# Altium PCB novena_battery_evt1a.PcbDoc (part 3 of 3)
Units mil, origin at the board's own origin, x right, y up, seen from the top; angles counter-clockwise.
Board outline 4763.78 x 1614.17 mil, 4 copper layers (Top Layer, Internal Plane 1, Internal Plane 2, Bottom Layer), stack 65.8 mil thick; 204 components, 130 nets, 1424 pads, 318 vias.
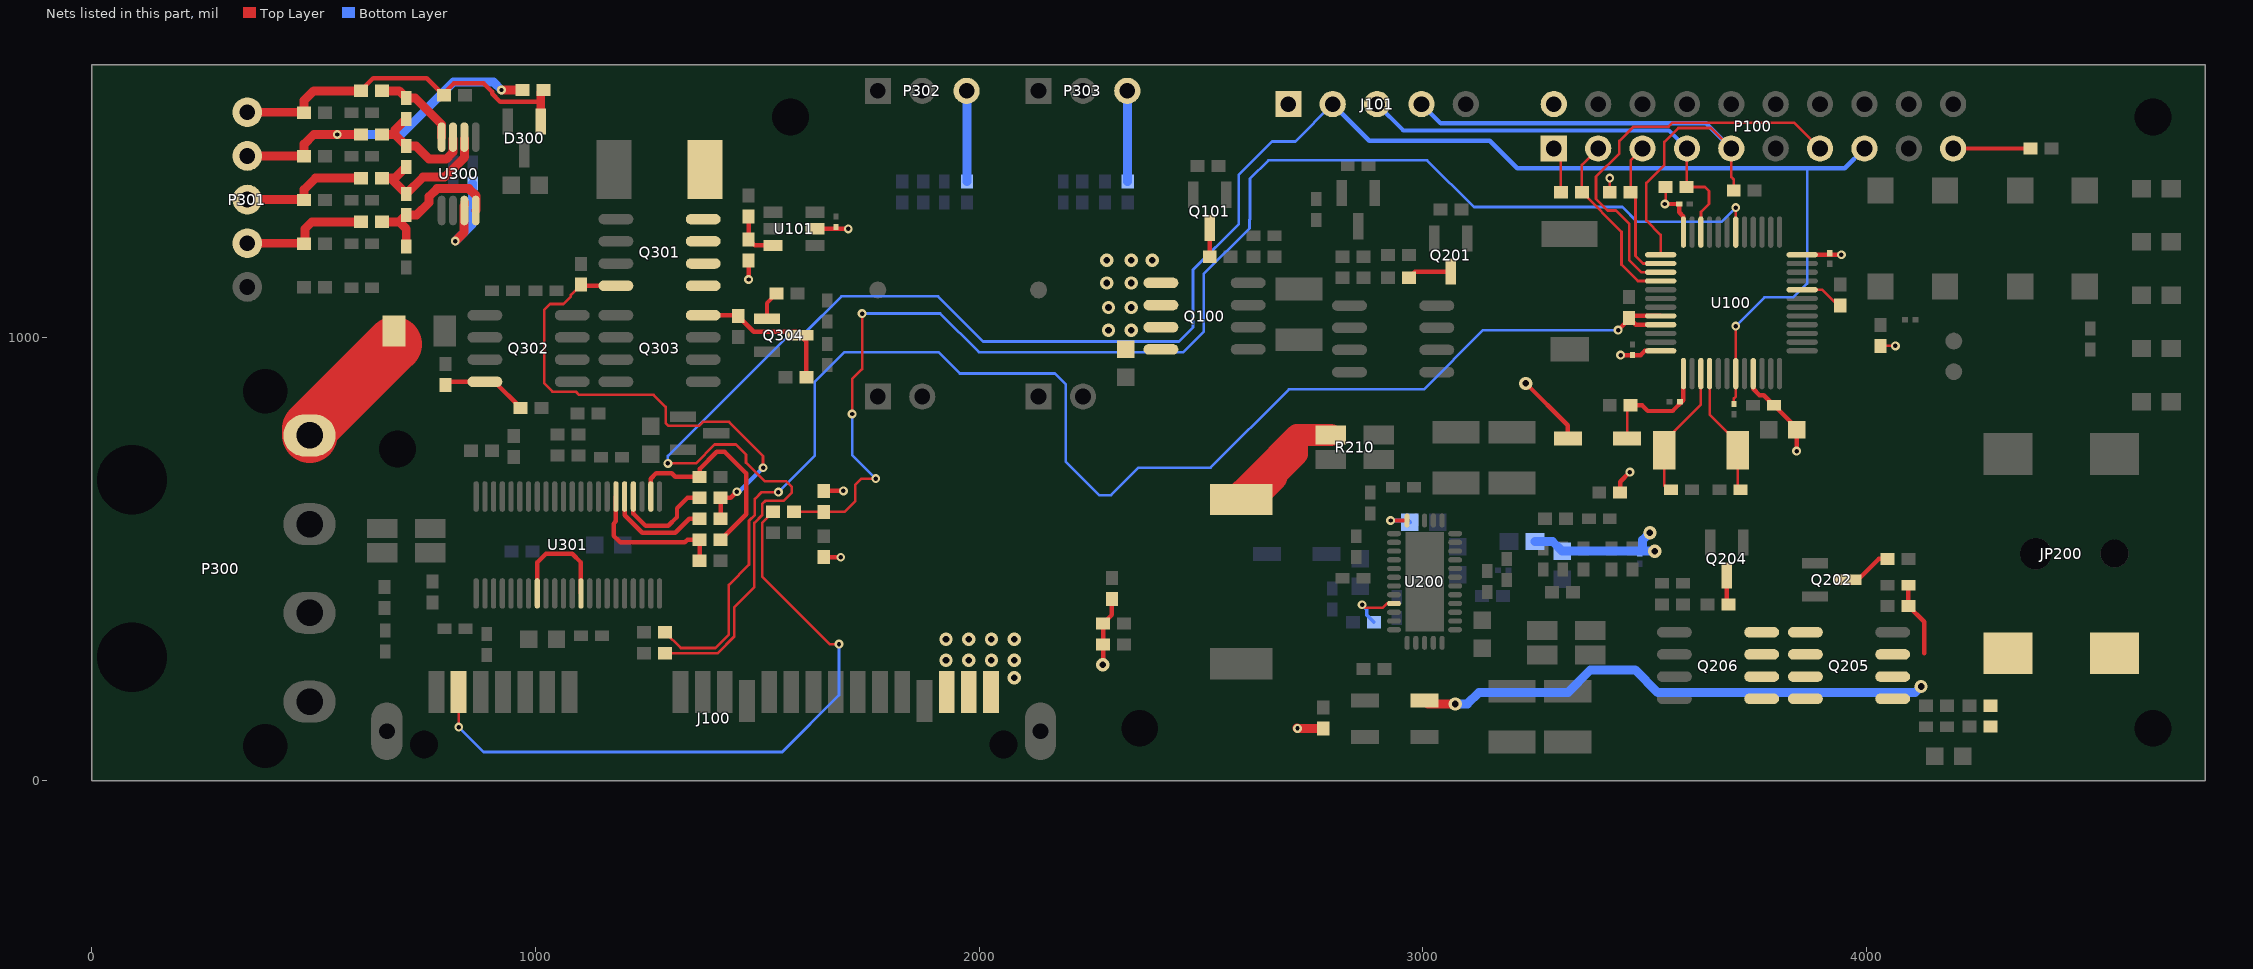
[diagram p5: the nets of this part, all layers, seen from the top]

## Via types
v1: diameter 20, hole 10, Top Layer to Bottom Layer, tented both sides, 179 vias
v2: diameter 30, hole 15, Top Layer to Bottom Layer, tented both sides, 129 vias
v3: diameter 25.98, hole 12.99, Top Layer to Bottom Layer, tented top, 10 vias

## Nets (pads, with @x,y where several pads share a name; then routed paths per layer and width w, separated by ;. In a path a pad name is that pad's centre, name@x,y a point inside that pad or via, vN(x,y) a via of type N, cw(c..) or ccw(c..) an arc to the next point about the centre after c; other vN are vias at no path point) (continued)
NetJ100_21: J100.21 R100.2 | length 1520.1
  Top Layer w6: J100.21@826.57,199.8 826.57,121.26 v1(826.77,121.06) ; R100.2@1535.43,606.3 1510.68,581.55 1510.68,460.48 1663.09,308.07 v1(1684.06,308.07)
  Bottom Layer w6: v1(826.77,121.06) 882.87,64.96 1556.1,64.96 1684.06,192.91 v1(1684.06,308.07)
NetL200_2: L200.2 R210.2 | length 554.2
  Top Layer w10: L200.2@2590.55,633.86 2622.05,665.35 2622.05,685.04
  Top Layer w50: L200.2@2590.55,633.86 2590.55,653.54 2622.05,685.04 2716.54,779.53 ; L200.2@2622.05,665.35 2622.05,633.86 2669.29,681.1 2669.29,688.98 2716.54,736.22 2716.54,779.53 ; R210.2@2792.32,779.53 2716.54,779.53
NetP100_19: P100.19 R115.2 | length 174.8
  Top Layer w10: P100.19@4195.28,1425.2 R115.2@4370.08,1425.2
NetP302_3: P302.3 R336.2 | length 205.1
  Bottom Layer w20: P302.3@1971.65,1555.12 1972.44,1554.33 R336.2@1972.44,1350.39
NetP303_3: P303.3 R337.2 | length 205.1
  Bottom Layer w20: P303.3@2333.86,1555.12 2334.65,1554.33 R337.2@2334.65,1350.39
NetQ101_3: Q101.3 R105.1 | length 65
  Top Layer w10: R105.1@2519.69,1181.1 Q101.3@2519.69,1246.06
NetQ201_3: Q201.3 R201.2 | length 100.2
  Top Layer w10: R201.2@2968.5,1133.86 2982.28,1147.64 Q201.3@3062.99,1147.64
NetQ202_3: Q202.3 R205.2 | length 108.2
  Top Layer w10: Q202.3@3958.66,452.76 3980.32,452.76 4027.56,500 R205.2@4047.24,500
NetQ204_3: Q204.3 R206.1 | length 66.6
  Top Layer w10: Q204.3@3685.04,462.6 3685.04,401.57 R206.1@3688.98,397.64
NetQ205_5: Q205.5 Q205.6 Q205.7 Q205.8 Q206.5 Q206.6 Q206.7 Q206.8
NetQ301_4: Q301.4 R301.1 R320.1 R321.1 | length 1141.1
  Top Layer w6: R301.1@1102.36,1118.11 1079.72,1095.47 1079.72,1091.54 1062.99,1074.8 1032.48,1074.8 1019.69,1062.01 1019.69,895.67 1038.39,876.97 1090.62,876.97 1097.51,870.08 1265.75,870.08 1293.31,842.52 1293.31,806.17 1299.42,800.06 1367.97,800.06 1376.97,809.06 1435.96,809.06 1512.8,732.22 v1(1512.8,705.71)
  Top Layer w10: R301.1@1102.36,1118.11 1104.53,1115.94 Q301.4@1181.1,1115.94 ; R321.1@1417.32,590.55 R320.1@1417.32,637.8 1439.96,637.8 v1(1453.74,651.57)
  Bottom Layer w10: v1(1453.74,651.57) 1458.66,651.57 v1(1512.8,705.71)
NetQ301_5: Q301.5 Q301.6 Q301.7 Q301.8 R300.1
NetQ302_4: Q302.4 R303.2 R307.1 | length 196.9
  Top Layer w10: R303.2@797.24,891.73 804.92,899.41 Q302.4@885.83,899.41 907.68,899.41 R307.1@966.54,840.55
NetQ303_4: Q303.4 Q304.3 R304.1 R308.1 | length 337.5
  Top Layer w10: Q303.4@1377.95,1049.41 1454.53,1049.41 R304.1@1456.69,1047.24 1492.13,1011.81 1588.58,1011.81 Q304.3@1596.46,1003.94 1610.24,990.16 R308.1@1610.24,909.45
NetQ304_1: Q304.1 R311.1 | length 66.1
  Top Layer w10: Q304.1@1521.65,1041.34 1521.65,1076.77 R311.1@1543.31,1098.43
NetR116_2: R116.2 U100.20 | length 100.9
  Top Layer w6: U100.20@3854.98,1106.83 3900.06,1106.83 3936.02,1070.87 R116.2@3940.95,1070.87
NetR117_2: R117.2 R118.1 U101.6 | length 112
  Top Layer w10: R118.1@1480.31,1271.65 R117.2@1480.31,1220.47 1494.09,1206.69 U101.6@1535.43,1206.69
NetR211_1: R211.1 U200.26 | length 129.2
  Top Layer w6: v1(2863.19,396.65) 2870.08,389.76 2909.45,389.76 2919.29,399.61 U200.26@2935.04,399.61
  Bottom Layer w8: v1(2863.19,396.65) 2874.02,385.83 2874.02,373.03 R211.1@2889.76,357.28
NetR319_2: R319.2 R322.2 U301.2 | length 490.7
  Top Layer w10: U301.2@1259.84,640.75 1259.84,681.1 1271.65,692.91 1307.09,692.91 1314.96,685.04 R319.2@1370.08,685.04 1370.08,702.93 1408.62,741.47 1426.02,741.47 1474.74,692.75 1474.74,600.72 R322.2@1417.32,543.31
NetR320_2: R320.2 U301.4 | length 237
  Top Layer w10: U301.4@1220.47,640.75 1220.47,602.36 1248.03,574.8 1299.21,574.8 1318.9,594.49 1318.9,614.17 1342.52,637.8 R320.2@1370.08,637.8
NetR321_2: R321.2 U301.5 | length 241.2
  Top Layer w10: U301.5@1200.79,640.75 1200.79,598.43 1240.41,558.8 1314.71,558.8 1346.46,590.55 R321.2@1370.08,590.55
NetR322_1: R322.1 R323.1 U301.6 | length 340.6
  Top Layer w10: U301.6@1181.1,640.75 1181.1,584.82 1175.85,579.56 1175.85,552.5 1190.94,537.4 1336.61,537.4 1342.52,543.31 R322.1@1370.08,543.31 R323.1@1370.08,496.06
NetU301_30: U301.30 U301.35 | length 254.5
  Top Layer w10: U301.30@1003.94,422.24 1003.94,492.13 1023.62,511.81 1082.68,511.81 1102.36,492.13 U301.35@1102.36,422.24
P2_CD: C309.1 U300.3 | length 242.4
  Top Layer w20: v1(818.9,1216.53) 839.16,1236.79 839.16,1296.2 840.3,1297.34 U300.3@840.3,1303.82
  Bottom Layer w20: v1(818.9,1216.53) 858.27,1255.9 C309.1@858.27,1346.46
P2_VC1: C304.1 R306.2 U300.8 | length 194.8
  Top Layer w20: R306.2@653.54,1555.12 692.91,1555.12 C304.1@708.66,1539.37 728.35,1539.37 788.39,1479.33 U300.8@788.39,1450.79
P2_VC2: C304.2 C306.1 R310.2 U300.7 | length 265.3
  Top Layer w20: R310.2@653.54,1456.69 683.07,1456.69 ; C304.2@708.66,1492.13 683.07,1466.54 683.07,1456.69 ; U300.7@813.98,1446.19 813.98,1416.62 798.68,1401.32 760.09,1401.32 730.32,1431.1 C306.1@708.66,1431.1 683.07,1456.69
P2_VC3: C306.2 C308.1 R312.2 U300.6 | length 302.2
  Top Layer w20: C306.2@708.66,1383.86 683.07,1358.27 673.23,1358.27 C308.1@708.66,1322.83 746.72,1360.9 795.03,1360.9 839.98,1405.85 U300.6@839.98,1446.19
P2_VC4: C308.2 C311.1 R318.2 U300.4 | length 353.7
  Top Layer w20: R318.2@653.54,1259.84 692.91,1259.84 ; C311.1@708.66,1204.72 708.66,1244.09 692.91,1259.84 ; U300.4@865.16,1285.43 866.3,1286.57 866.3,1318.46 849.86,1334.9 778.09,1334.9 759.84,1316.65 759.84,1303.15 732.28,1275.59 C308.2@708.66,1275.59 692.91,1259.84
P3.3V_UC: C102.1 C103.1 C104.1 C106.1 C107.1 C112.2 C113.2 C115.1 C222.1 D100.1 J101.1 L100.2 P100.1 P100.2 R109.2 R110.2 R111.2 R112.2 R113.2 R117.1 R119.2 R216.1 R220.1 R222.1 R225.1 R226.1 U100.9 U100.24 U100.36 U100.48 U101.2 U200.17 | length 1771.2
  Top Layer w6: P100.1@3295.28,1425.2 3311.02,1409.45 R113.2@3311.02,1326.77 ; R112.2@3421.26,1326.77 v1(3421.26,1358.27) ; v1@3545.28,1300.2 3547.24,1302.17 R111.2@3547.24,1338.58 ; R119.2@4031.5,980.31 v1(4064.96,980.32)
  Top Layer w10: v1@1479.33,1128.94 v1(1480.31,1129.92) R117.1@1480.31,1173.23 ; U101.2@1629.92,1244.09 v1(1704.72,1244.09) ; R109.2@1649.61,503.94 v1(1687.99,503.94) ; R110.2@1649.61,653.54 v1(1693.9,653.54) ; v2(2278.54,261.81) 2279.53,262.8 R225.1@2279.53,307.09 R226.1@2279.53,354.33 2299.21,374.02 R222.1@2299.21,409.45 ; v1(2927.17,586.61) U200.17@2964.57,586.61 ; v2(3232.28,895.67) 3326.77,801.18 D100.1@3326.77,771.65 D100.1@3337.6,771.65 ; R220.1@3444.88,649.61 3444.88,674.21 v1(3466.54,695.87) ; v1(3445.87,959.65) 3491.14,959.65 3500.54,969.04 U100.48@3536.08,969.04 ; v1@3545.28,1300.2 v1(3545.45,1300.02) C103.1@3577.93,1300.02 3577.93,1281.32 3587.27,1271.99 U100.36@3587.27,1236.76 ; U100.9@3744.75,917.86 3744.75,883.38 3758.86,869.27 3768.53,869.27 C112.2@3791.34,846.46 3842.52,795.28 C113.2@3842.52,791.34 v1(3842.52,743.11) v1@3843.5,742.13 ; U100.24@3854.98,1185.57 v1(3943.45,1185.57) v1@3943.9,1186.02
  Top Layer w20: v1@2716.54,119.09 v1(2717.52,118.11) R216.1@2775.59,118.11
  Bottom Layer w10: v1(2927.17,586.61) 2966.54,586.61 C222.1@2970.47,582.68
  Bottom Layer w20: L100.2@3252.95,539.37 3292.32,539.37 C106.1@3313.98,517.72 C107.1@3494.09,517.72 ; v2(3511.81,559.06) 3495.08,542.32 3495.08,518.7 C107.1@3494.09,517.72 ; v2(3522.64,517.72) C107.1@3494.09,517.72
PM_JRST: P100.3 R113.1 U100.40 | length 417.8
  Top Layer w6: P100.3@3395.28,1425.2 3358.27,1388.19 R113.1@3358.27,1326.77 3447.83,1237.2 3447.83,1163.39 3484.7,1126.52 U100.40@3536.08,1126.52
PM_JTCK: J101.4 P100.9 R114.2 U100.37 | length 1304.2
  Top Layer w6: U100.37@3536.08,1185.57 3536.08,1230.65 3503.94,1262.8 3503.94,1347.44 3544.29,1387.8 3544.29,1439.96 3575.79,1471.46 3649.02,1471.46 P100.9@3695.28,1425.2 3695.28,1360.83 3700.79,1355.32 R114.2@3700.79,1330.71
  Bottom Layer w10: J101.4@2996.85,1525.2 3040.32,1481.72 3638.75,1481.72 P100.9@3695.28,1425.2
PM_JTDI: P100.5 R112.1 U100.38 | length 321.6
  Top Layer w6: P100.5@3495.28,1425.2 3468.5,1398.43 R112.1@3468.5,1326.77 3479.33,1315.94 3479.33,1183.07 3496.51,1165.89 U100.38@3536.08,1165.89
PM_JTDO: P100.13 U100.39 | length 907.8
  Top Layer w6: U100.39@3536.08,1146.2 3492.57,1146.2 3465.55,1173.23 3465.55,1254.92 3435.04,1285.43 3416.58,1285.43 3390.37,1311.63 3390.37,1361.83 3442.91,1414.37 3442.91,1441.93 3475.39,1474.41 3554.13,1474.41 3563.18,1483.46 3837.02,1483.46 P100.13@3895.28,1425.2
PM_JTMS: J101.3 P100.7 R111.1 U100.34 | length 981.3
  Top Layer w6: P100.7@3595.28,1425.2 3594.49,1424.41 R111.1@3594.49,1338.58 3635.83,1338.58 3644.98,1329.43 3644.98,1300.5 3626.97,1282.48 3626.97,1237.09 U100.34@3626.64,1236.76
  Bottom Layer w10: J101.3@2896.85,1525.2 2956.32,1465.72 3554.75,1465.72 P100.7@3595.28,1425.2
PM_NRST: C114.1 J101.2 P100.15 R103.1 U100.7 | length 4918.8
  Top Layer w6: R103.1@1291.34,287.4 1410.43,287.4 1447.69,324.66 1447.69,390.89 1493.3,436.5 1493.3,581.14 1510.69,598.52 1510.69,623.81 1517.78,630.91 1559.06,630.91 1577.76,649.61 1577.76,662.4 1564.96,675.2 1516.44,675.2 1474.41,717.22 1474.41,735.24 1451.77,757.87 1403.54,757.87 1361.22,715.55 v1(1298.23,715.55) ; C114.1@3701.1,849.7 3701.1,861.53 3705.38,865.81 U100.7@3705.38,917.86 v1(3705.38,1024.94) v1@3704.72,1025.59
  Bottom Layer w6: v1(1298.23,715.55) 1298.23,732.07 1573.23,1007.08 1604.52,1007.08 1689.35,1091.91 1907.34,1091.91 2009.1,990.16 2450.31,990.16 2481.91,1021.75 2481.91,1151.91 2585.25,1255.26 2585.25,1366.24 2659.96,1440.94 2712.6,1440.94 J101.2@2796.85,1525.2 ; v1(3705.38,1024.94) 3770,1089.57 3834.65,1089.57 3866.14,1121.06 3866.14,1380.91
  Bottom Layer w10: J101.2@2796.85,1525.2 2879.13,1442.91 3150.59,1442.91 3212.6,1380.91 3866.14,1380.91 3950.98,1380.91 P100.15@3995.28,1425.2
PM_OSC32_IN: C110.1 U100.3 Y100.2 | length 309.9
  Top Layer w6: C110.1@3563.46,655.59 3554.06,655.59 3544.21,665.43 Y100.2@3544.21,744.67 3544.21,765.67 3626.64,848.09 U100.3@3626.64,917.86
PM_OSC32_OUT: C111.1 U100.4 Y100.1 | length 289
  Top Layer w6: U100.4@3646.32,917.86 3646.32,826.12 3709.57,762.87 Y100.1@3709.57,744.67 3709.57,656.94 C111.1@3710.92,655.59
PM_REFLASH_ALRT: R102.1 R106.2 U100.44 U100.45 | length 3260
  Top Layer w6: R102.1@1291.34,334.65 1292.32,334.65 1327.57,299.4 1405.46,299.4 1435.69,329.63 1435.69,441.6 1481.3,487.2 1481.3,586.11 1494.32,599.12 1494.32,635.06 1509.84,650.59 v1(1547.24,650.59)
  Top Layer w10: v1(3439.96,1015.75) 3464.57,1040.35 R106.2@3464.57,1043.31 ; U100.45@3536.08,1028.09 3479.78,1028.09 R106.2@3464.57,1043.31 ; U100.44@3536.08,1047.78 3469.04,1047.78 R106.2@3464.57,1043.31
  Bottom Layer w6: v1(1547.24,650.59) 1629.13,732.47 1629.13,898.46 1696.82,966.16 1908.37,966.16 1956.37,918.16 2170.6,918.16 2194.88,893.87 2194.88,719.25 2270.25,643.88 2296.92,643.88 2358.74,705.71 2521.65,705.71 2698.36,882.42 3002.5,882.42 3135.83,1015.75 v1(3439.96,1015.75)
PM_TO_HOST_UART: R100.1 R110.1 U100.30 | length 3091.4
  Top Layer w6: R100.1@1582.68,606.3 R110.1@1649.61,606.3 1696.85,606.3 1720.47,629.92 1720.47,666.34 1735.24,681.1 v1(1766.73,681.1) ; v1(1713.58,826.77) 1713.58,905.51 1736.22,928.15 v1(1736.22,1053.15) ; U100.30@3705.38,1236.76 v1(3705.38,1291.99)
  Bottom Layer w6: v1(1713.58,826.77) 1713.58,734.25 v1(1766.73,681.1) ; v1(1736.22,1053.15) 1912.16,1053.15 1999.16,966.16 2460.25,966.16 2505.91,1011.81 2505.91,1141.97 2609.25,1245.32 2609.25,1264.76 2610.24,1265.75 2610.24,1357.28 2651.57,1398.62 3009.84,1398.62 3115.16,1293.31 3449.8,1293.31 3483.27,1259.84 3673.23,1259.84 v1(3705.38,1291.99)
PM_VBAT: C109.1 D100.2 R107.2 U100.1 | length 274.2
  Top Layer w6: D100.2@3460.63,771.65 3460.63,838.58 R107.2@3468.5,846.46 ; C109.1@3579.29,852.7 C109.1@3579.29,854.6
  Top Layer w10: R107.2@3468.5,846.46 3494.09,846.46 3507.09,833.46 3562.88,833.46 3587.27,857.85 U100.1@3587.27,917.86
PWR_TO_HOST: C101.1 J100.1 J100.2 J100.3 Q100.5 Q100.6 Q100.7 Q100.8
  other v2: 2078.74,232.28 1925.2,271.65 1976.38,271.65 2027.56,271.65 2078.74,271.65 1925.2,318.9 1976.38,318.9 2027.56,318.9 2078.74,318.9 2291.34,1015.75 2342.52,1015.75 2291.34,1066.93 2342.52,1066.93 2287.4,1122.05 2342.52,1122.05 2287.4,1173.23 2342.52,1173.23 2389.76,1173.23
RAW_ACIN: C204.2 D201.1 JP200.1 Q205.1 Q205.2 Q205.3 R208.1 R213.1 R214.1 | length 1349.3
  Top Layer w10: C204.2@4094.49,440.94 R208.1@4094.49,393.7 4129.92,358.27 4129.92,287.4
  Top Layer w20: D201.1@3003.94,181.1 3011.81,173.23 v2(3072.83,173.23)
  Bottom Layer w20: v2(3072.83,173.23) 3100.39,173.23 3125.98,198.82 3326.77,198.82 3377.95,250 3478.35,250 3529.53,198.82 4109.25,198.82 v2(4123.03,212.6)
VBAT: F300.1 P300.1 | length 284.8
  Top Layer w125: P300.1@490.55,778.35 490.55,793.7 F300.1@681.1,984.25
VC1: D300.1 P301.1 R305.2 R306.1 R309.1 R313.1 | length 833.1
  Top Layer w10: R306.1@606.3,1555.12 606.3,1555.93 633.86,1583.49 755.09,1583.49 R309.1@793.31,1545.28 793.31,1549.21 815.94,1571.85 883.05,1571.85 902.23,1552.67 902.23,1548.39 920.1,1530.51 1010.83,1530.51 1011.81,1529.53
  Top Layer w20: P301.1@350.39,1506.89 477.36,1506.89 R313.1@478.35,1505.91 478.35,1533.46 500,1555.12 R306.1@606.3,1555.12 ; D300.1@1011.81,1486.22 1011.81,1529.53 1011.81,1551.18 R305.2@1017.72,1557.09
VC2: P301.2 R305.1 R310.1 R314.1 | length 766.4
  Top Layer w20: P301.2@350.39,1408.46 477.36,1408.46 R314.1@478.35,1407.48 478.35,1435.04 500,1456.69 v1(553.15,1456.69) R310.1@606.3,1456.69 ; v1(923.23,1557.09) R305.1@970.47,1557.09
  Bottom Layer w20: v1(553.15,1456.69) 696.85,1456.69 814.96,1574.8 905.51,1574.8 v1(923.23,1557.09)
VC3: P301.3 R312.1 R315.1 | length 290.5
  Top Layer w20: P301.3@350.39,1310.04 477.36,1310.04 R315.1@478.35,1309.06 478.35,1332.68 503.94,1358.27 R312.1@606.3,1358.27
VC4: P301.4 R316.1 R318.1 | length 295.1
  Top Layer w20: P301.4@350.39,1211.61 477.36,1211.61 R316.1@478.35,1210.63 480.32,1212.6 480.32,1244.09 496.06,1259.84 R318.1@606.3,1259.84
pads on no net: D300.2 D301.2 J100.0 J100.7 J100.8 J100.9 J100.13 J100.14 J100.15 JP200.0 P100.4 P100.17 P300.0 P300.4 U100.2 U100.5 U100.6 U100.11 U100.12 U100.13 U100.19 U100.26 U100.41 U100.42 U100.43 U100.46 U301.12 U301.16 U301.17 U301.19

## Polygon pours and split planes (outlines as drawn)
GND on Top Layer "bottom - GND" (solid, remove dead copper, pour order 4): 3561.02,-126.97 4703.74,-126.97 4896.65,65.94 4896.65,1653.54 4794.29,1755.91 64.96,1755.91 -58.07,1632.87 -58.07,-88.58 29.53,-176.18 74.8,-130.91 3617.13,-130.91
GND on Bottom Layer "bottom - GND" (solid, remove dead copper, pour order 2): 4404.53,1717.52 54.13,1717.52 -58.07,1605.32 -58.07,-25.59 36.42,-120.08 4758.86,-120.08 4913.39,34.45 4913.39,1573.82 4787.4,1699.8 4773.62,1713.58 4375.98,1713.58
GND on Internal Plane 1 (split plane): 3437.85,565.24 3437.85,545.98 3432.37,540.5 3417.04,540.5 3409.59,547.95 3409.59,562.29 3418.03,570.72 3432.37,570.72
GND on Internal Plane 1 (split plane): 3229.19,510.12 3229.19,494.8 3217.8,483.41 3208.38,483.41 3196.01,495.78 3196.01,507.17 3208.38,519.54 3219.77,519.54
GND on Internal Plane 1 (split plane): 3007.73,695.16 3007.73,647.64 3007.73,607.99 2957.75,558 2956.86,556.68 2956.55,555.12 2956.55,390.75 2956.86,389.19 2957.75,387.86 2969.56,376.05 2970.88,375.17 2972.44,374.86 2987.48,374.86 3000.84,361.5 3000.84,339.29 2990.44,328.88 2785.15,328.88 2726.52,387.52 2726.52,452.76 2726.52,572.13 2869.8,715.41 2987.48,715.41
GND on Internal Plane 1 (split plane): 1477.22,714.85 1477.22,486.93 1441.22,450.93 1368.11,450.93 1366.55,450.62 1365.23,449.73 1192.21,276.72 1131.61,276.72 1076.7,331.62 1075.38,332.51 1073.82,332.82 719.49,332.82 717.93,332.51 716.6,331.62 650.87,265.89 609.96,265.89 599.55,276.3 599.55,326.07 720.19,446.71 803.15,446.71 804.71,447.02 806.03,447.9 910.15,552.02 1029.53,552.02 1031.09,552.33 1032.41,553.22 1091.47,612.27 1091.91,612.94 1092.35,613.6 1092.66,615.16 1092.66,809.33 1140.47,857.14 1334.92,857.14
GND on Internal Plane 1 (split plane): 4743.68,20.1 20.1,20.1 20.1,1594.08 4743.68,1594.08
PWR_TO_HOST on Internal Plane 2 (split plane): 2458.52,1158.74 2458.52,882.59 2177.23,601.31 2176.35,599.99 2176.04,598.43 2176.04,598.42 2176.04,282.2 2098.7,204.87 1908.19,204.87 1902.7,210.35 1902.7,454.02 1961.55,512.86 1962.43,514.19 1962.74,515.75 1962.74,1081.97 2090.27,1209.5 2407.76,1209.5
CHG_SYS on Internal Plane 2 (split plane): 2853.42,1018.77 2854.08,1018.33 2854.74,1017.89 2856.3,1017.57 2856.3,1017.58 3050.48,1017.58 3229.4,838.65 3230.06,838.21 3230.72,837.77 3232.28,837.46 3328.04,837.46 3365.02,800.48 3365.02,689.96 3365.33,688.4 3366.21,687.08 3390.61,662.68 3390.61,587.32 3349.48,546.19 3348.59,544.87 3348.28,543.31 3348.28,402.56 3348.59,401 3349.48,399.68 3446.71,302.44 3446.71,194.6 3428.43,176.32 3109.25,176.32 3107.69,176.01 3106.37,175.13 3066.22,134.98 2974.13,134.98 2930.26,178.85 2930.26,294.57 2950.72,315.03 2951.16,315.69 2951.6,316.35 2951.91,317.91 2951.91,591.54 2951.6,593.1 2950.72,594.42 2937.92,607.21 2936.6,608.1 2935.04,608.41 2823.54,608.41 2555.26,876.69 2555.26,974.69 2657.2,1076.63 2795.55,1076.63
P3.3V_UC on Internal Plane 2 (split plane): 4743.68,20.1 20.1,20.1 20.1,1594.08 4743.68,1594.08

## Keep-outs
Keep-Out Layer:
  the board outline again, w39.37
  text "Route board on centerline of this outline" at 3866.14,-122.05 h30

## Other copper
Top Layer:
  rectangle net CHG_SYS: 2565.94,903.54 2652.56,971.46
  rectangle net CHG_SYS: 2644.69,903.54 2785.43,990.16
  rectangle net GND: 2998.03,311.02 3074.8,346.46
  rectangle net GND: 2998.03,207.68 3139.76,249.02
  rectangle net GND: 3070.87,301.18 3107.28,346.46
  rectangle net GND: 2998.03,240.16 3153.54,318.9
  rectangle net GND: 4208.66,673.23 4677.17,822.83
  rectangle net PWR_TO_HOST: 1909.45,216.54 2098.43,338.58
  rectangle net GND: 1456.69,220.47 1594.49,346.46
  rectangle net GND: 1759.84,220.47 1893.7,346.46
  rectangle net GND: 3098.43,598.43 3228.35,653.54
  rectangle net GND: 3015.75,633.86 3334.65,740.16
  rectangle net PWR_TO_HOST: 2267.72,960.63 2409.45,1196.85
  rectangle net CHG_SYS: 2625.98,960.63 2653.54,1082.68
  rectangle net CHG_SYS: 2625.98,959.65 2830.71,1070.87
  rectangle net BAT_PROTECTED: 2866.14,771.65 3255.91,842.52
  rectangle net BAT_PROTECTED: 3027.56,779.53 3122.05,1082.68
  rectangle net NetC206_2: 2917.32,279.53 2988.19,307.09
  rectangle net NetC206_2: 2519.69,279.53 2935.04,379.92
  rectangle net GND: 3106.3,27.56 3417.32,165.35
  rectangle net CHG_SYS: 3114.17,338.58 3192.91,381.89
  rectangle net CHG_SYS: 3082.68,354.33 3118.11,401.57
  rectangle net CHG_SYS: 3161.42,216.54 3224.41,381.89
  rectangle net CHG_SYS: 3200.79,181.1 3326.77,271.65
  rectangle net NetC205_2: 3405.51,224.41 3503.94,303.15
  rectangle net NetC205_2: 3503.94,224.41 3555.12,389.76
  rectangle net NetQ205_5: 3763.78,173.23 3866.14,346.46
  rectangle net RAW_ACIN: 4059.06,169.29 4102.36,208.66
  rectangle net RAW_ACIN: 4059.06,192.91 4275.59,303.15
  rectangle net RAW_ACIN: 4263.78,106.3 4523.62,326.77
  rectangle net BAT_PROTECTED: 1377.95,885.83 1527.56,1000
  rectangle net GND: 787.4,606.3 870.08,700.79
  rectangle net GND: 811.02,496.06 917.32,594.49
  rectangle net GND: 716.54,543.31 870.08,649.61
  rectangle net NetQ301_5: 1350.39,1106.3 1440.94,1444.88
  rectangle net NetD301_1: 1181.1,1157.48 1271.65,1275.59
  rectangle net NetD301_1: 1232.28,1059.06 1307.09,1275.59
  rectangle net NetD301_1: 1200.79,885.83 1307.09,1062.99
  rectangle net NetD301_1: 1094.49,885.83 1169.29,1062.99
  rectangle net NetC300_2: 795.28,937.01 874.02,1062.99
  pour cut-out: 1161.42,1574.8 1161.42,1523.62 1299.21,1523.62 1299.21,1574.8
  pour cut-out: 594.49,274.61 609.25,259.84 686.02,259.84 709.65,283.46 1277.56,283.46 1474.41,480.32 1474.41,714.57 1332.68,856.3 1134.84,856.3 1080.71,802.17 1080.71,606.3 1037.4,562.99 964.57,562.99 945.87,544.29 945.87,500.98 924.21,479.33 645.67,479.33 594.49,428.15
  pour cut-out: 2931.1,716.54 2869.09,716.54 2721.46,568.9 2721.46,379.92 2781.5,319.88 3459.65,319.88 3569.88,430.12 3569.88,596.46 3553.15,613.19 3260.83,613.19 3231.3,583.66 3045.28,583.66 3004.92,624.02 3004.92,699.8 2985.24,719.49 2983.27,717.52 2913.39,717.52
  text "1" at 1173.23,1535.43 h30
Bottom Layer:
  pour cut-out: 1161.42,1523.62 1299.21,1523.62 1299.21,1574.8 1161.42,1574.8
  pour cut-out: 1326.77,857.28 1134.84,857.28 933.07,655.51 933.07,503.94 905.51,476.38 649.61,476.38 589.57,416.34 589.57,279.53 611.22,257.87 683.07,257.87 708.66,283.46 1266.73,283.46 1476.38,493.11 1476.38,713.58 1333.66,856.3 1320.87,856.3
  pour cut-out: 3500,330.71 3573.82,404.53 3573.82,593.5 3556.1,611.22 3398.62,611.22 3367.13,579.72 3105.31,579.72 3003.94,681.1 3003.94,699.8 2986.22,717.52 2878.94,717.52 2724.41,562.99 2724.41,378.94 2772.64,330.71
  text "4" at 1267.72,1535.43 h30
Internal Plane 1 (plane layer: these items are gaps in the copper):
  rectangle: 1224.41,1523.62 1299.21,1574.8
  rectangle: 1161.42,1523.62 1188.98,1574.8
  lines w8: 595.47,274.61 595.47,327.76 718.5,450.79 803.15,450.79 908.46,556.1 1029.53,556.1 1088.58,615.16 1088.58,811.02 1138.78,861.22 1336.61,861.22 1481.3,716.54 1481.3,485.24 1442.91,446.85 1368.11,446.85 1193.9,272.64 1129.92,272.64 1073.82,328.74 982.28,328.74 719.49,328.74 652.56,261.81 608.27,261.81 595.47,274.61 ; 2722.44,385.83 2783.46,324.8 2948.82,324.8 2992.13,324.8 3004.92,337.6 3004.92,363.19 2989.17,378.94 2972.44,378.94 2960.63,390.75 2960.63,555.12 3011.81,606.3 3011.81,647.64 3011.81,696.85 2989.17,719.49 2868.11,719.49 2722.44,573.82 2722.44,452.76 2722.44,385.83 ; 3191.93,494.09 3191.93,508.86 3206.69,523.62 3221.46,523.62 3233.27,511.81 3233.27,493.11 3219.49,479.33 3206.69,479.33 3191.93,494.09 ; 3405.51,546.26 3405.51,563.98 3416.34,574.8 3434.06,574.8 3441.93,566.93 3441.93,544.29 3434.06,536.42 3415.35,536.42 3405.51,546.26
  text "2" at 1196.85,1535.43 h30
Internal Plane 2 (plane layer: these items are gaps in the copper):
  rectangle: 1259.84,1523.62 1299.21,1574.8
  rectangle: 1161.42,1523.62 1224.41,1574.8
  lines w8: 3034.45,1021.65 3052.17,1021.65 ; 3052.17,1021.65 3232.28,841.54 3329.72,841.54 3369.09,802.17 3369.09,689.96 3394.69,664.37 3394.69,585.63 3352.36,543.31 3352.36,402.56 3450.79,304.13 3450.79,192.91 3430.12,172.24 3191.93,172.24 3109.25,172.24 3067.91,130.91 2972.44,130.91 2926.18,177.17 2926.18,296.26 2947.83,317.91 2947.83,591.54 2935.04,604.33 2821.85,604.33 2551.18,875 2551.18,976.38 2655.51,1080.71 2797.24,1080.71 2856.3,1021.65 3052.17,1021.65 ; 1898.62,208.66 1906.5,200.79 2100.39,200.79 2180.12,280.51 2180.12,598.43 2462.6,880.91 2462.6,1160.43 2409.45,1213.58 2088.58,1213.58 1958.66,1083.66 1958.66,515.75 1898.62,455.71 1898.62,208.66
  text "3" at 1232.28,1535.43 h30

## Silkscreen, mask and mechanical layers (free items; w line width, h text height)
Top Overlay:
  lines w7.87: 1738.87,372.81 ccw(c1773.02,372.81) 1773.02,338.67 2058.87,338.67 ccw(c2058.87,378.67) 2098.87,378.67 2098.87,558.67 ccw(c2058.87,558.67) 2058.87,598.67 1778.87,598.67 ccw(c1778.87,558.67) 1738.87,558.67 1738.87,372.81
  text "Novena" at 1759.84,1240.16 h40
  text "Battery Board" at 1759.84,1181.1 h40
  text "EVT1-A" at 1858.27,1114.17 h30
  text "Designed in" at 1807.09,1047.24 h30
  text "Singapore" at 1807.09,992.13 h30
  text "10/12" at 1807.09,921.26 h30
  text "Sutajio Ko-Usagi Pte Ltd" at 1531.5,283.46 h30
Bottom Overlay:
  circle w5: c2190.28,537.4 r22.96
  rectangle: 3732.28,62.99 4311.02,255.91
  text "c bunnie@kosagi.com" at 2200.79,527.56 h30
  text "CC3.0-BY-SA + XL1.0" at 2212.6,468.5 h30
  text "S/N:" at 4437.01,216.54 h30
Mechanical 2:
  lines w3.94: 0,0 0,1377.95
Mechanical 3:
  lines w5: 5155.59,-148.28 5205.59,-198.28 ; 5155.59,2001.72 5205.59,2051.72 ; 5255.59,-148.28 5205.59,-198.28 ; 5255.59,2001.72 5205.59,2051.72 ; 6155.59,-48.28 7805.59,-48.28 ; 6155.59,551.72 7805.59,551.72 7705.59,451.72 ; 6155.59,1401.72 7805.59,1401.72 7705.59,1301.72 ; 6155.59,1901.72 7805.59,1901.72 ; 6205.59,451.72 6305.59,551.72 ; 6205.59,1301.72 6305.59,1401.72 ; 6255.59,1.72 6305.59,-48.28 ; 6255.59,451.72 6355.59,551.72 ; 6255.59,551.72 6155.59,451.72 7805.59,451.72 ; 6255.59,1301.72 6355.59,1401.72 ; 6255.59,1401.72 6155.59,1301.72 7805.59,1301.72 ; 6255.59,1851.72 6305.59,1901.72 ; 6305.59,451.72 6405.59,551.72 ; 6305.59,1301.72 6405.59,1401.72 ; 6355.59,1.72 6305.59,-48.28 ; 6355.59,1851.72 6305.59,1901.72 ; 6405.59,451.72 6505.59,551.72 ; 6405.59,1301.72 6505.59,1401.72 ; 6455.59,451.72 6555.59,551.72 ; 6455.59,1301.72 6555.59,1401.72 ; 6505.59,451.72 6605.59,551.72 ; 6505.59,1301.72 6605.59,1401.72 ; 6586.73,1952.43 6636.73,2002.43 ; 6605.59,451.72 6705.59,551.72 ; 6605.59,1301.72 6705.59,1401.72 ; 6636.73,1902.43 6736.73,2002.43 ; 6655.59,451.72 6755.59,551.72 ; 6655.59,1301.72 6755.59,1401.72 ; 6686.73,1902.43 6736.73,1952.43 ; 6686.73,2002.43 6586.73,1902.43 6586.73,2002.43 6736.73,2002.43 ; 6705.59,451.72 6805.59,551.72 ; 6705.59,1301.72 6805.59,1401.72 ; 6736.73,1902.43 6736.73,2002.43 ; 6755.59,451.72 6855.59,551.72 ; 6755.59,1301.72 6855.59,1401.72 ; 6846.57,1952.43 6896.57,2002.43 ; 6855.59,451.72 6955.59,551.72 ; 6855.59,1301.72 6955.59,1401.72 ; 6896.57,1902.43 6996.57,2002.43 ; 6905.59,451.72 7005.59,551.72 ; 6905.59,1301.72 7005.59,1401.72 ; 6946.57,1902.43 6996.57,1952.43 ; 6946.57,2002.43 6846.57,1902.43 6846.57,2002.43 6996.57,2002.43 ; 6955.59,451.72 7055.59,551.72 ; 6955.59,1301.72 7055.59,1401.72 ; 6996.57,1902.43 6996.57,2002.43 ; 7005.59,451.72 7105.59,551.72 ; 7005.59,1301.72 7105.59,1401.72 ; 7105.59,451.72 7205.59,551.72 ; 7105.59,1301.72 7205.59,1401.72 ; 7155.59,451.72 7255.59,551.72 ; 7155.59,1301.72 7255.59,1401.72 ; 7305.59,451.72 7405.59,551.72 ; 7305.59,1301.72 7405.59,1401.72 ; 7355.59,451.72 7455.59,551.72 ; 7355.59,1301.72 7455.59,1401.72 ; 7505.59,-98.28 7555.59,-48.28 ; 7505.59,-48.28 7505.59,-148.28 ; 7505.59,451.72 7605.59,551.72 ; 7505.59,1301.72 7605.59,1401.72 ; 7505.59,1951.72 7555.59,2001.72 ; 7555.59,-148.28 7655.59,-48.28 7655.59,-148.28 7505.59,-148.28 ; 7555.59,451.72 7655.59,551.72 ; 7555.59,1301.72 7655.59,1401.72 ; 7555.59,1901.72 7655.59,2001.72 ; 7605.59,-148.28 7655.59,-98.28 ; 7605.59,-48.28 7505.59,-148.28 ; 7605.59,451.72 7705.59,551.72 ; 7605.59,1301.72 7705.59,1401.72 ; 7605.59,1901.72 7655.59,1951.72 ; 7605.59,2001.72 7505.59,1901.72 7505.59,2001.72 7655.59,2001.72 ; 7655.59,451.72 7755.59,551.72 ; 7655.59,1301.72 7755.59,1401.72 ; 7655.59,1901.72 7655.59,2001.72 ; 7755.59,451.72 7805.59,501.72 ; 7755.59,1301.72 7805.59,1351.72 ; 5205.59,-198.28 5205.59,2051.72 ; 6305.59,-48.28 6305.59,1901.72 ; 6155.59,501.72 6205.59,551.72 6155.59,501.72 ; 6155.59,1351.72 6205.59,1401.72 6155.59,1351.72 ; 6355.59,451.72 6455.59,551.72 6355.59,451.72 ; 6355.59,1301.72 6455.59,1401.72 6355.59,1301.72 ; 6555.59,451.72 6655.59,551.72 6555.59,451.72 ; 6555.59,1301.72 6655.59,1401.72 6555.59,1301.72 ; 6805.59,451.72 6905.59,551.72 6805.59,451.72 ; 6805.59,1301.72 6905.59,1401.72 6805.59,1301.72 ; 7055.59,451.72 7155.59,551.72 7055.59,451.72 ; 7055.59,1301.72 7155.59,1401.72 7055.59,1301.72 ; 7205.59,451.72 7305.59,551.72 7205.59,451.72 ; 7205.59,1301.72 7305.59,1401.72 7205.59,1301.72 ; 7255.59,451.72 7355.59,551.72 7255.59,451.72 ; 7255.59,1301.72 7355.59,1401.72 7255.59,1301.72 ; 7405.59,451.72 7505.59,551.72 7405.59,451.72 ; 7405.59,1301.72 7505.59,1401.72 7405.59,1301.72 ; 7455.59,451.72 7555.59,551.72 7455.59,451.72 ; 7455.59,1301.72 7555.59,1401.72 7455.59,1301.72
  text "Board name: Novena Battery Board EVT1A" at 5705.59,3001.72 h39.37
  text "Contact: bunnie@kosagi.com (preferred)" at 5705.59,2901.72 h39.37
  text "+65 9733 6927 (mobile voice and SMS)" at 6055.59,2801.72 h39.37
  text "+1 858 837 2074 (SMS only)" at 6055.59,2701.72 h39.37
  text "No impedance control requirement" at 6700.79,2283.46 h30
  text "Silk: white" at 6707.2,2212.47 h30
  text "Soldermask: green" at 6702.28,2153.42 h30
  text "Material and thickness" at 5105.59,2151.72 h50
  text "Finish: Immersion gold" at 6702.28,2100.27 h30
  text "Plate 0.5 oz" at 5705.59,1951.72 h30
  text "Top-bottom pair" at 6305.59,1951.72 h30 r45
  text "Copper 1.0 oz" at 5705.59,1901.72 h30
  text "Total 1.5 oz" at 5705.59,1841.72 h30
  text "Prepreg" at 5305.59,1501.72 h30
  text "FR-4 0.1mm" at 5705.59,1501.72 h30
  text "Copper 1 oz" at 5705.59,1351.72 h30
  text "Plane" at 7955.59,1351.72 h30
  text "0.035mm" at 5825.59,1301.72 h30
  text "Core" at 5305.59,901.72 h30
  text "FR-4 height as needed to meet overall height spec" at 5705.59,901.72 h30
  text "Overall height: 1.58mm +/-10%" at 5155.59,701.72 h30 r90
  text "Copper 1 oz" at 5705.59,501.72 h30
  text "0.035mm" at 5825.59,451.72 h30
  text "Plane" at 7955.59,451.72 h30
  text "Prepreg" at 5305.59,301.72 h30
  text "FR-4 0.1mm" at 5705.59,301.72 h30
  text "Copper 1.0 oz" at 5705.59,-98.28 h30
  text "Finish: Immersion gold" at 6705.24,-133.98 h30
  text "Plate 0.5 oz" at 5705.59,-148.28 h30
  text "Soldermask: green" at 6700.31,-196.98 h30
  text "Total 1.5oz" at 5711.85,-210.01 h30
  text "Silk: white" at 6705.24,-259.97 h30
  text "Mech via: 10 mil hole / 20 mil pad smallest" at 5699.68,-343.16 h30
  text "Route: 6mil / 6mil smallest" at 5699.68,-443.16 h30
Drill Drawing:
  text ".LEGEND" at 5300.39,50.39 h60
  text "Drill Drawing." at 5300.39,-49.61 h60

## Dimensions
0,0 to 0,1614.17 on Mechanical 3
0,1614.17 to 4763.78,1614.17 on Mechanical 3

## Text inside footprints (layer, text, board x,y; h text height)
P100: Top Overlay "20" at 4255.28,1505.2 h50; Top Overlay "19" at 4255.28,1405.2 h50; Top Overlay "1" at 3195.28,1405.2 h50; Top Overlay "2" at 3195.28,1505.2 h50